# Altium PCB RaspberryMicroSD.PcbDoc
Units mm, origin at the board's own origin, x right, y up, seen from the top; angles counter-clockwise.
Board outline 17.1 x 29 mm, 2 copper layers (Top Layer, Bottom Layer); 2 components, 10 nets, 27 pads, 0 vias.
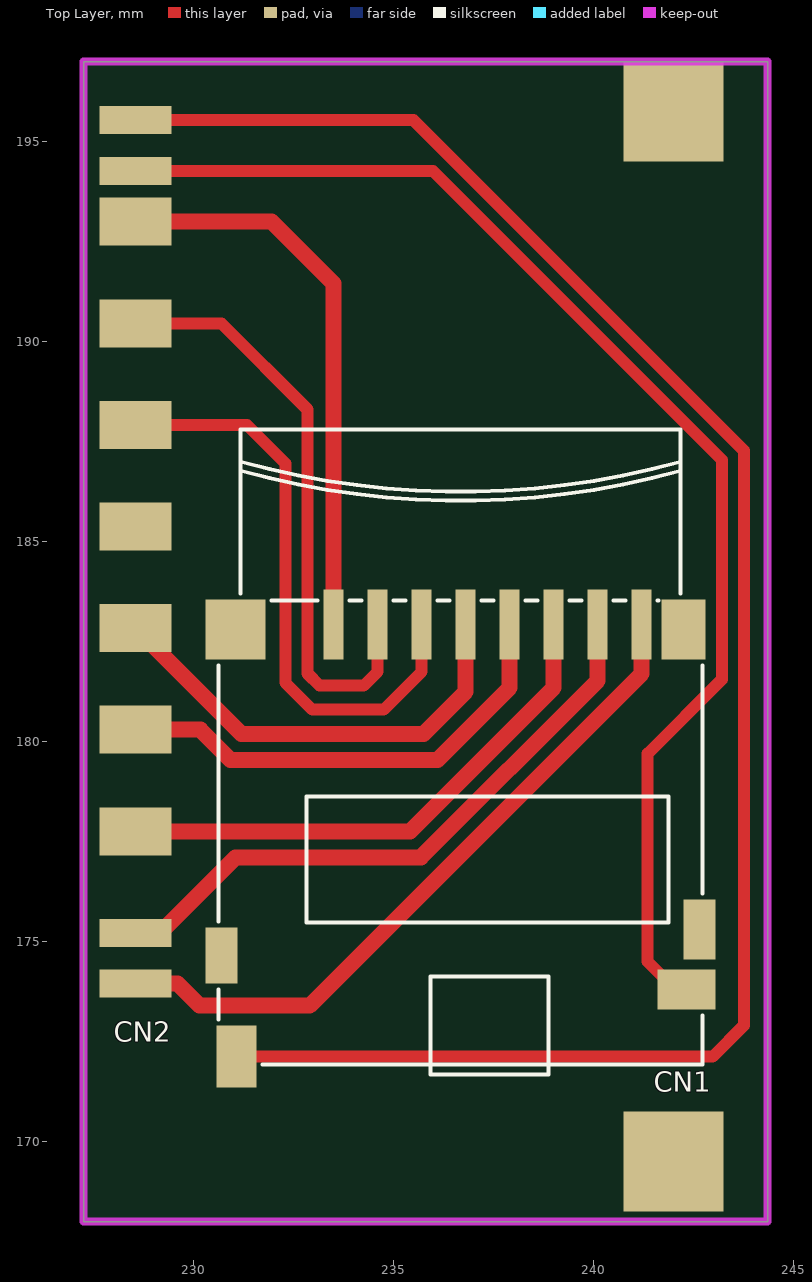
[diagram p0: Top Layer view]
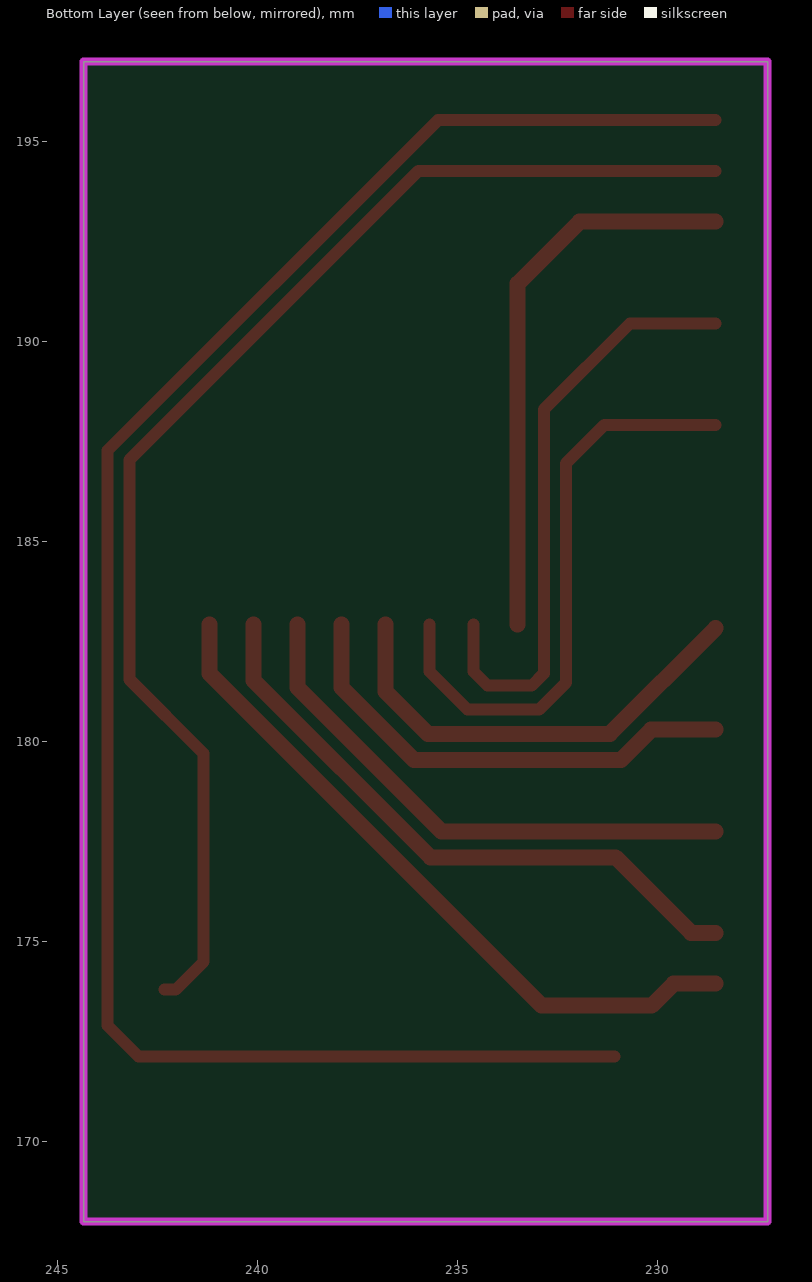
[diagram p1: Bottom Layer view, seen from below]

## Layer stack, top to bottom
Top Layer: signal copper 0.0356
Dielectric: dielectric 0.32, FR-4, Dk 4.8
Bottom Layer: signal copper 0.0356

## Board outline
227.25,168 244.35,168 244.35,197 227.25,197

## Design rules (kind name [scope] priority, off if disabled: settings)
Clearance [All] p1: gap=0.254
PolygonConnect [All] p1: connectstyle=Relief reliefconductorwidth=0.254 reliefentries=4 polygonreliefangle="90 Angle" airgapwidth=0.254
RoomDefinition Sheet1 [InComponentClass('Sheet1')] p1: confinementstyle=ConfineIn formatcopy=TRUE lockcomponents=FALSE outline 223.5,163.75 251.25,163.75 251.25,200.25 223.5,200.25
RoutingVias [All] p1: holewidth=0.711 width=1.27 viastyle="Through Hole" minholewidth=0.711 minwidth=1.27 maxholewidth=0.711 maxwidth=1.27
SolderMaskExpansion [All] p1: expansion=0.102
Width [All] p1: maxlimit=0.4 minlimit=0.254 preferedwidth=0.4
28 further rules are at their usual default settings.

## Components (designator, comment, footprint, x,y, rotation, side; value= is the part's Value field where it differs from the comment)
CN1 "Hirose DS3D-SF Micro SD Card Connector" DM3D-SF 242.65,172 r180 top
CN2 "SD/MMC Card Connector" PCBComponent_1 228.55,193 r90 top

## Footprints (in the part's own frame and the unit in brackets; to place one, negate y for a bottom-side part, rotate by r counter-clockwise, add the part's x,y. Pads: shape width x height; smd on the part's side, far side on the other; paste and mask are expansions set on the pad)
DM3D-SF [mm] "Hirose DM3D-SF, Push-Pull (no ejection mechanism) Micro SD Card Socket"
  rect 0.5x1.75 smd: 1(9.15,-10.925) 2(8.05,-10.925) 3(6.95,-10.925) 4(5.85,-10.925) 5(4.75,-10.925) 6(3.65,-10.925) 7(2.55,-10.925) 8(1.45,-10.925)
  rect 1x1.55 smd: CD1(11.575,-0.125)
  rect 1.45x1 smd: CD2(0.325,-1.8)
  rect 1.5x1.5 smd: Mech1(11.6,-10.8)
  rect 0.8x1.4 smd: Mech2(11.95,-2.65)
  rect 0.8x1.5 smd: Mech3(0,-3.3)
  rect 1.1x1.5 smd: Mech4(0.4,-10.8)
  silkscreen extent -0.07,-15.8 12.03,0.33, body extent 0,-11.45 11.95,0, height 1.55
PCBComponent_1 [mm]
  rect 1.2x1.8 smd: 1(-2.54,0) 2(-5.08,0) 3(-7.62,0) 4(-10.16,0) 5(-12.7,0) 6(-15.24,0) 9(0,0)
  rect 0.7x1.8 smd: 7(-17.78,0) 8(-19.05,0) CD1(1.27,0) CD2(2.54,0)

## Part data
CN1: library part DM3D-SF, "DM3D Micro SD, Push-Pull (no ejection mechanism) Card Connector"
CN2: library part SD/MMC_1

## Free pads (board coordinates)
  rect 2.5x2.5 smd: 9(242,169.5) 9(242,195.75)

## Nets (pads, with @x,y where several pads share a name; then routed paths per layer and width w, separated by ;. In a path a pad name is that pad's centre, name@x,y a point inside that pad or via, vN(x,y) a via of type N, cw(c..) or ccw(c..) an arc to the next point about the centre after c; other vN are vias at no path point)
NetCN1_1: 
NetCN1_2: 
NetCN1_3: 
NetCN1_4: 
NetCN1_5: 
NetCN1_6: 
NetCN1_7: 
NetCN1_8: 
NetCN1_CD1: 
NetCN1_CD2: 
pads on no net: CN1.1 CN1.2 CN1.3 CN1.4 CN1.5 CN1.6 CN1.7 CN1.8 CN1.CD1 CN1.CD2 CN1.Mech1 CN1.Mech2 CN1.Mech3 CN1.Mech4 CN2.1 CN2.2 CN2.3 CN2.4 CN2.5 CN2.6 CN2.7 CN2.8 CN2.9 CN2.CD1 CN2.CD2
copper on no net: | length 192.3
  Top Layer w0.3: 228.55,187.92 231.33,187.92 232.292,186.958 232.292,181.474 232.967,180.8 234.75,180.8 235.7,181.75 235.7,182.925 ; 228.55,190.46 230.69,190.46 232.846,188.304 232.846,181.704 233.15,181.4 234.25,181.4 234.6,181.75 234.6,182.925 ; 228.55,194.27 235.98,194.27 243.204,187.046 243.204,181.554 241.35,179.7 241.35,174.5 242.05,173.8 242.325,173.8 ; 228.55,195.54 235.493,195.54 243.758,187.275 243.758,172.908 242.975,172.125 231.075,172.125
  Top Layer w0.4: 228.55,173.95 229.6,173.95 230.15,173.4 232.9,173.4 241.2,181.7 241.2,182.925 ; 228.55,175.22 229.164,175.22 231.05,177.106 235.681,177.106 240.1,181.525 240.1,182.925 ; 228.55,177.76 235.41,177.76 239,181.35 239,182.925 ; 228.55,180.3 230.165,180.3 230.923,179.542 236.092,179.542 237.9,181.35 237.9,182.925 ; 228.55,182.84 231.194,180.196 235.746,180.196 236.8,181.25 236.8,182.925 ; 228.55,193 231.95,193 233.5,191.45 233.5,182.925

## Keep-outs
Keep-Out Layer:
  the board outline again, w0.2

## Silkscreen, mask and mechanical layers (free items; w line width, h text height)
Mechanical 16:
  lines w0.127: 92.9,131.051 97.98,131.051 ; 92.9,179.311 97.98,179.311 ; 92.9,227.571 97.98,227.571 ; 165.925,82.791 165.925,87.871 ; 165.925,270.751 165.925,275.831 ; 230.06,87.871 265.62,87.871 ; 238.95,82.791 238.95,87.871 ; 238.95,270.751 238.95,275.831 ; 260.007,87.896 260.032,87.871 ; 274.842,87.885 274.842,110.973 379.913,110.973 ; 274.868,103.455 379.887,103.455 ; 274.893,95.479 379.887,95.479 ; 293.823,87.885 293.823,95.479 ; 293.843,91.466 379.887,91.466 ; 311.975,270.751 311.975,275.831 ; 325.363,87.936 325.363,95.454 ; 354.293,95.479 354.293,110.973 ; 369.318,103.455 369.318,110.97 ; 379.92,131.051 385,131.051 ; 379.92,179.311 385,179.311 ; 379.92,227.571 385,227.571 ; 92.9,82.791 92.9,275.831 385,275.831 385,82.791 92.9,82.791 ; 97.98,87.871 379.92,87.871 379.92,113.144 379.92,270.751 97.98,270.751 97.98,87.871
  text "1" at 129.146,272.402 h1.78
  text "2" at 201.79,272.402 h1.78
  text "3" at 274.942,272.402 h1.78
  text "4" at 347.84,272.402 h1.78
  text "A" at 94.805,249.39 h1.78
  text "A" at 381.825,249.39 h1.78
  text "B" at 94.805,201.333 h1.78
  text "B" at 381.825,201.333 h1.78
  text "C" at 94.805,152.819 h1.78
  text "C" at 381.825,152.819 h1.78
  text "PROJECT NAME:" at 275.757,108.967 h1.14
  text "REVISION:" at 355.207,108.967 h1.14
  text "A4" at 372.668,105.895 h2.29
  text "RaspberryMicroSD" at 300.343,105.563 h2.54
  text "1.0.0" at 358.493,105.12 h1.78
  text "D" at 94.805,104.813 h1.78
  text "PROJECT NUMBER:" at 355.182,101.448 h1.14
  text "TITLE:" at 275.731,101.372 h1.14
  text "Raspberry Pi MicroSD Card Slot" at 291.5,97.5 h2.16
  text "ONW-000" at 362.668,97.271 h1.78
  text "DATE:" at 275.858,93.27 h1.14
  text "Pawel Poryzala" at 343.626,92.786 h1.52
  text "1" at 305.045,92.711 h1.52
  text "DRAWN BY:" at 326.43,92.71 h1.52
  text "of" at 308.728,92.635 h1.52
  text "1" at 313.148,92.635 h1.52
  text "SHEET" at 295.266,92.609 h1.52
  text "06/05/2013" at 277.027,89.155 h1.52
  text "Pawel Poryzala" at 343.652,89.154 h1.52
  text "CHECKED BY:" at 326.405,89.027 h1.52
  text ".PCB_FILE_NAME_NO_PATH" at 295.165,89.002 h1.52
  text "1" at 129.146,84.442 h1.78
  text "2" at 201.79,84.442 h1.78